# Altium PCB TTFT_3.0.PcbDoc
Units mil, origin at the board's own origin, x right, y up, seen from the top; angles counter-clockwise.
Board outline 2320 x 1680 mil, 4 copper layers (Top Layer, Internal Plane 1, Internal Plane 2, Bottom Layer), stack 30.634 mil thick; 23 components, 23 nets, 149 pads, 43 vias.
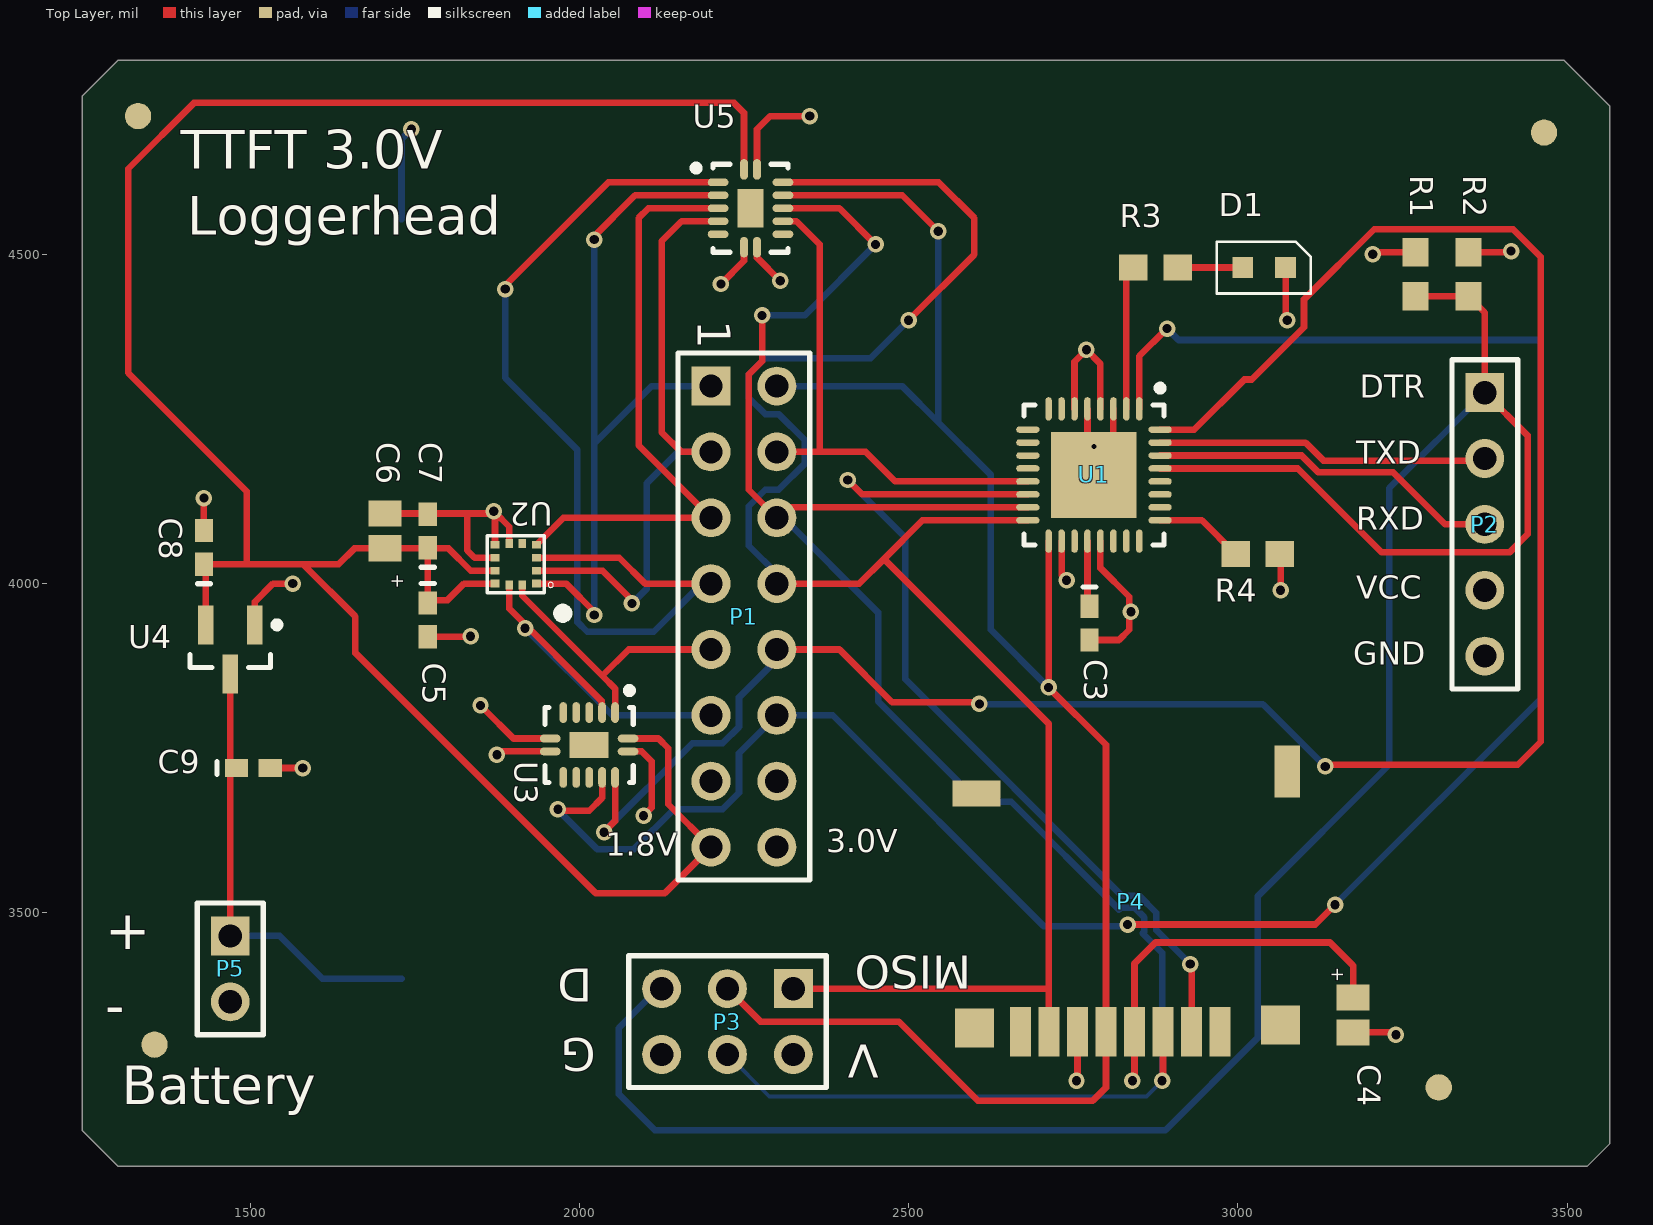
[diagram p0: Top Layer view]
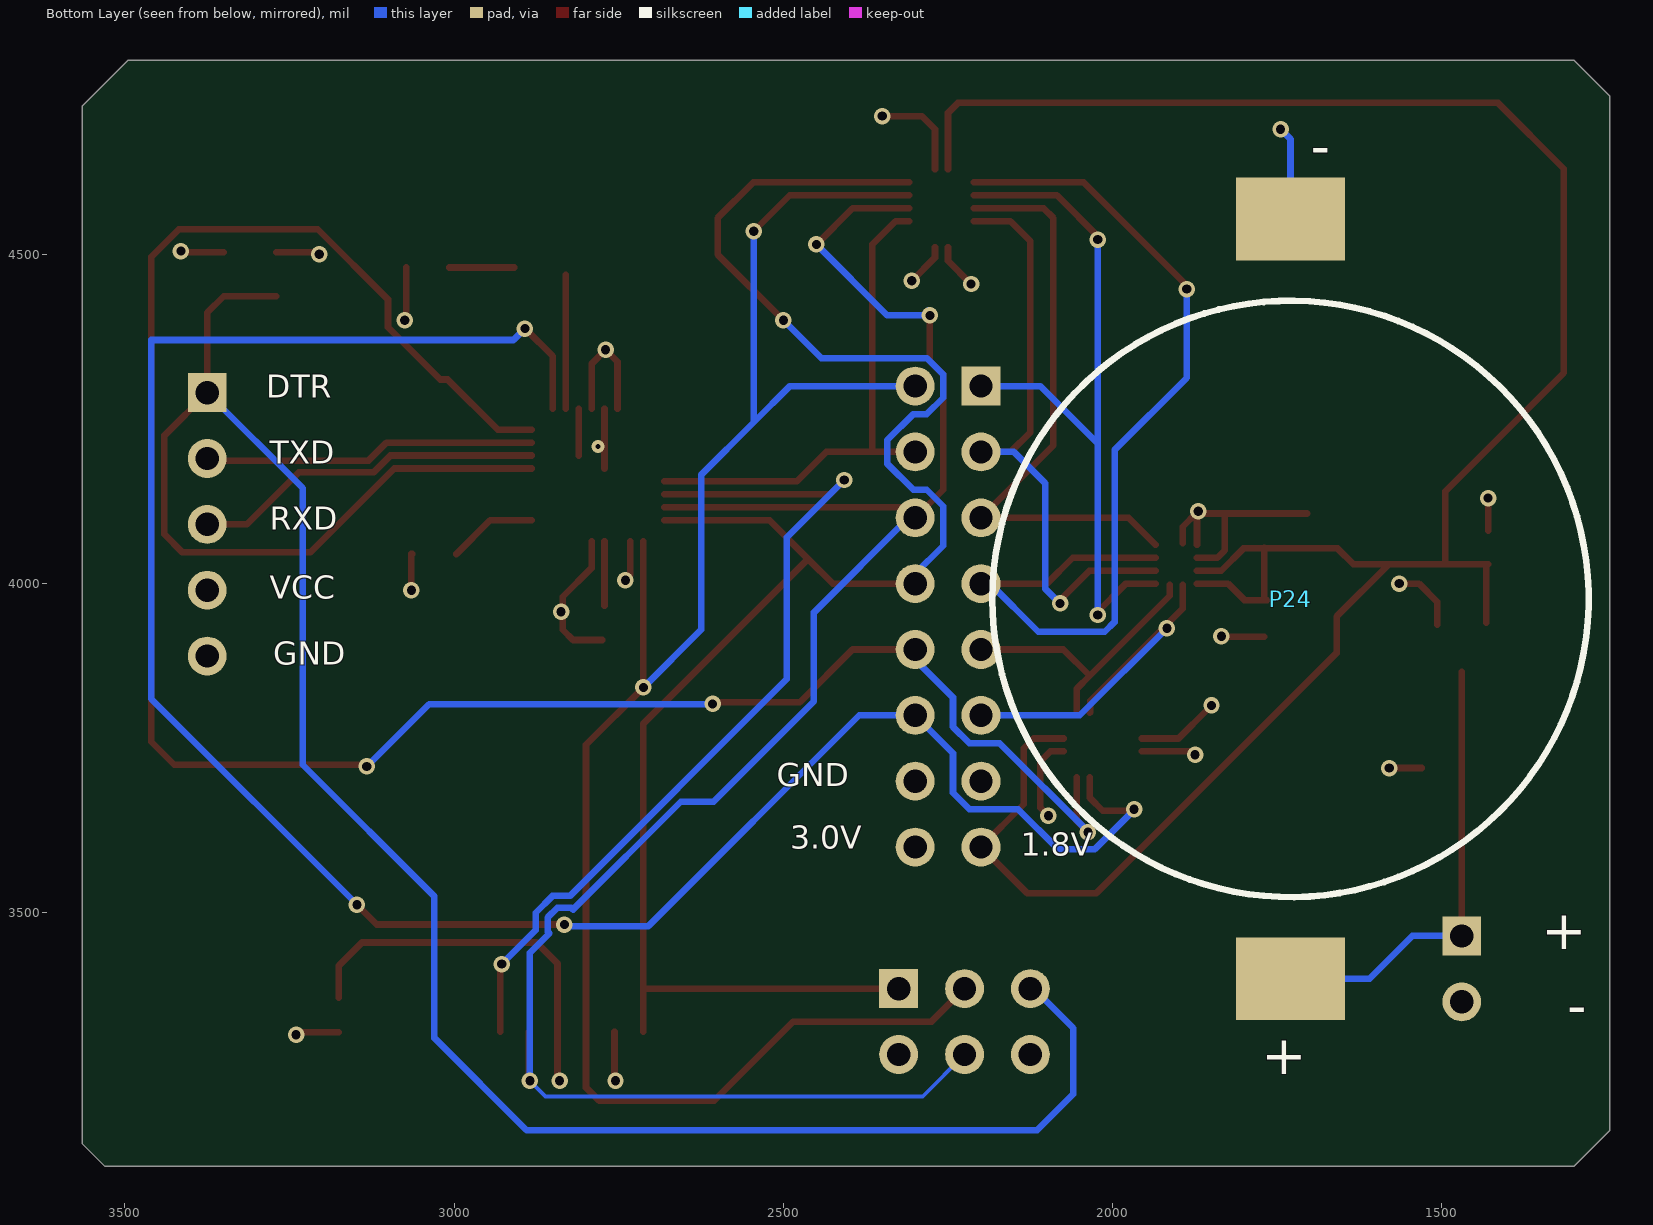
[diagram p1: Bottom Layer view, seen from below]
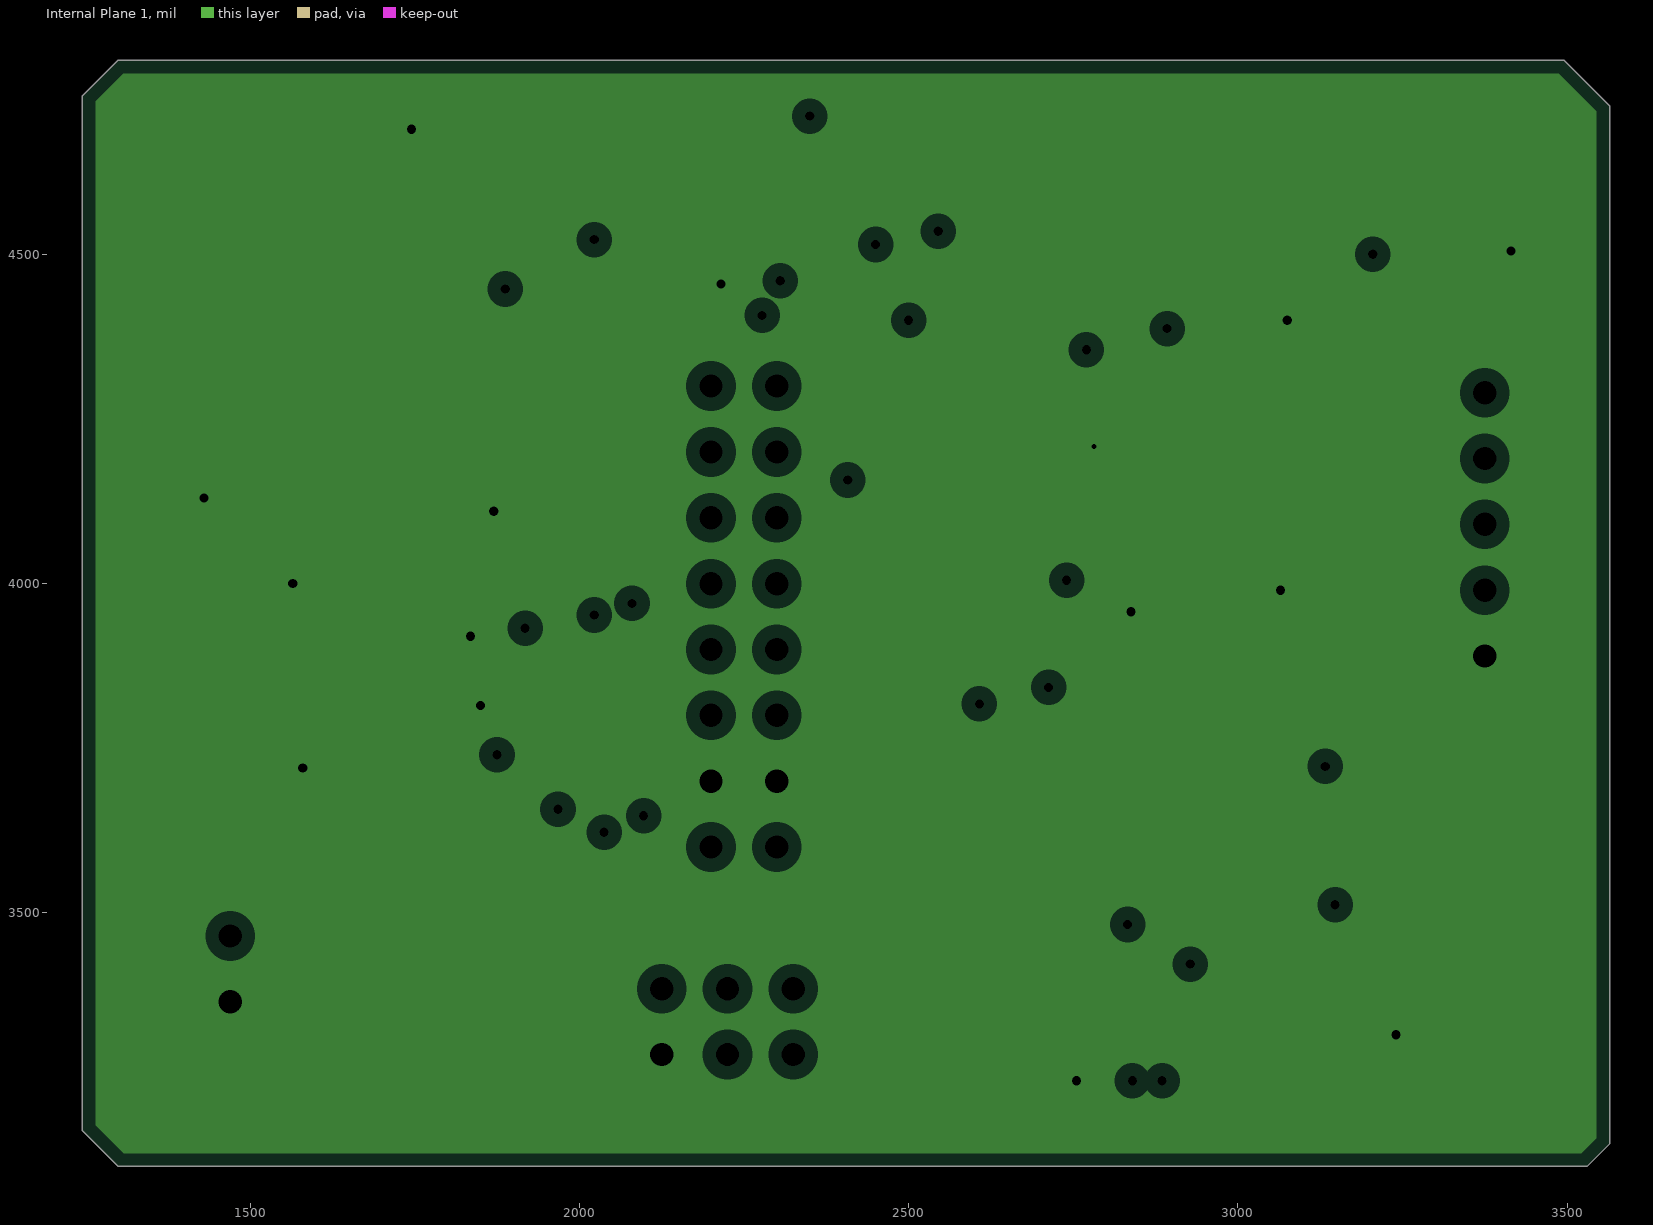
[diagram p2: Internal Plane 1, clearances drawn from the general rule]
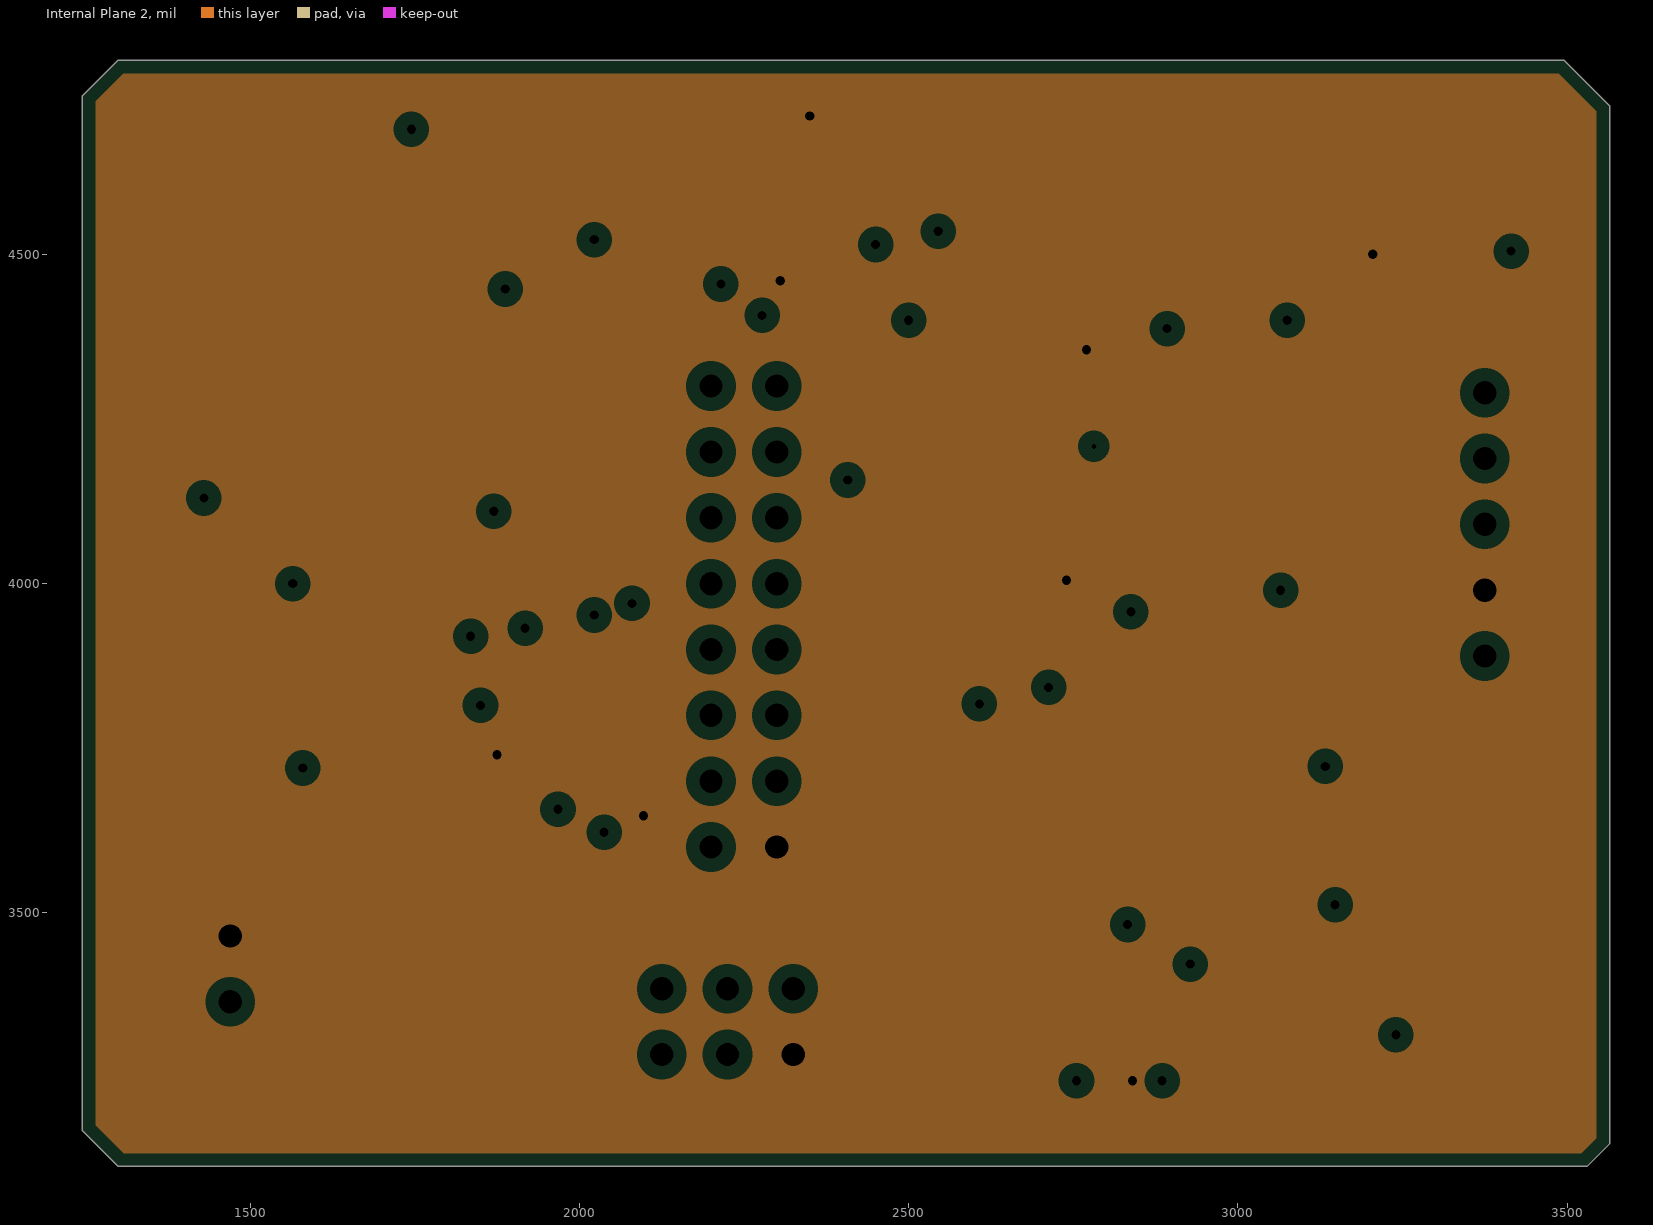
[diagram p3: Internal Plane 2, clearances drawn from the general rule]

## Layer stack, top to bottom
Top Solder: solder mask 0.4, Solder Resist, Dk 3.5
Top Layer: signal copper 1.4
Dielectric 1: core 10, FR-4, Dk 4.2
Internal Plane 1: plane copper 1.417, net GND
Dielectric 3: prepreg 5, Dk 4.2
Internal Plane 2: plane copper 1.417, net VCC
Dielectric 2: core 10, Dk 4.2
Bottom Layer: signal copper 1.4
Bottom Solder: solder mask 0.4, Solder Resist, Dk 3.5

## Board outline
1245,3170 1245,4740 1300,4795 3495,4795 3565,4725 3565,3150 3530,3115 1300,3115

## Design rules (kind name [scope] priority, off if disabled: settings)
Clearance [All] p1: gap=8
PlaneClearance [All] p1: clearance=20
PlaneConnect [All] p1: planeconnectstyle=Relief reliefexpansion=20 reliefentries=4 reliefconductorwidth=10 reliefairgap=10
PolygonConnect [All] p1: connectstyle=Relief reliefconductorwidth=10 reliefentries=4 polygonreliefangle="90 Angle" airgapwidth=10
RoutingVias [All] p1: holewidth=28 width=50 viastyle="Through Hole" minholewidth=28 minwidth=50 maxholewidth=28 maxwidth=50
SolderMaskExpansion [All] p1: expansion=4
Width [All] p1: maxlimit=100 minlimit=6 preferedwidth=10
27 further rules are at their usual default settings.

## Components (designator, comment, footprint, x,y, rotation, side; value= is the part's Value field where it differs from the comment)
C3 "0.1uF" 0402 2775,3940 r270 top
C4 "10uF" Tant0805 3175,3345 r90 top
C5 "100nF" 0402 1770,3945 r270 top
C6 "10uF" Tant0805 1705,4080 r270 top
C7 "100nF" 0402 1770,4080 r90 top
C8 "1.0uF" 0402 1430,4055 r90 top
C9 "1.0uF" 0402 1505,3720 r0 top
D1 "LED_0603" Diode0603 3040,4480 r0 top
P1 "Header 8X2A" HDR2X8_CEN 2200,4300 r270 top
P2 "Header 5" HDR1X5 3375,4290 r270 top
P3 "AVR SPI" HDR2X3 2325,3385 r180 top
P4 "microSD Hirose" "DM3D microSD" 2910,3445 r90 top
P5 "Header 2" HDR1X2 1470,3465 r270 top
P24 "CoinCellHolder" CoinCellHolder 1730,3400 r90 bottom
R1 "10k" 3-0603 3270,4470 r90 top
R2 "omit" 3-0603 3350,4470 r90 top
R3 "330" 3-0603 2875,4480 r0 top
R4 "omit" 3-0603 3030,4045 r0 top
U1 "ATmega8-16AC" 32M1-A_M 2781.54,4165 r270 top
U2 "LIS2DS12" LGA-12 1935,4000 r180 top
U3 "Level Shifter" DHVQFN14 2015,3755 r270 top
U4 "MCP1700T-1802E/TT" SOT-23-TT3_N 1470,3900 r270 top
U5 "Level Shifter" DHVQFN14 2260,4570 r0 top

## Footprints (in the part's own frame and the unit in brackets; to place one, negate y for a bottom-side part, rotate by r counter-clockwise, add the part's x,y. Pads: shape width x height; smd on the part's side, far side on the other; paste and mask are expansions set on the pad)
3-0603 [mm] "Chip Resistor; Body 1.6 x 0.9 mm (LxW typ)"
  rect 1.1x1 smd: 1(-0.85,0) 2(0.85,0)
32M1-A_M [mm] "QFN, 32-Leads, Body 5x5mm, Pitch 0.5mm, Thermal Pad 3.3x3.3mm, IPC Low Density"
  oval 0.9x0.25 smd: 1(-2.55,1.75) 2(-2.55,1.25) 3(-2.55,0.75) 4(-2.55,0.25) 5(-2.55,-0.25) 6(-2.55,-0.75) 7(-2.55,-1.25) 8(-2.55,-1.75) 17(2.55,-1.75) 18(2.55,-1.25) 19(2.55,-0.75) 20(2.55,-0.25) 21(2.55,0.25) 22(2.55,0.75) 23(2.55,1.25) 24(2.55,1.75)
  oval 0.25x0.9 smd: 9(-1.75,-2.55) 10(-1.25,-2.55) 11(-0.75,-2.55) 12(-0.25,-2.55) 13(0.25,-2.55) 14(0.75,-2.55) 15(1.25,-2.55) 16(1.75,-2.55) 25(1.75,2.55) 26(1.25,2.55) 27(0.75,2.55) 28(0.25,2.55) 29(-0.25,2.55) 30(-0.75,2.55) 31(-1.25,2.55) 32(-1.75,2.55)
  rect 3.3x3.3 smd paste-1.27: 33(0,0)
  silkscreen extent -3.47,-2.7 2.7,2.7, body extent -2.55,-2.55 2.55,2.55, height 1
0402 [mm] "Chip Capacitor; Body 1.0 x 0.5 mm (LxW typ)"
  rect 0.9x0.7 smd: 1(-0.65,0) 2(0.65,0)
  silkscreen extent -1.4,-0.25 -1.4,0.25
CoinCellHolder [mm] "MPD BU2032SM-BT-GTR"
  rect 3.2x4.2 smd: 1(0,0) 2(29.3,0)
  silkscreen extent 3.15,-11.5 26.15,11.5
DHVQFN14 [mm] "QFN, 14-Leads, Body 2.50x3.00mm, Pitch 0.50mm, Thermal Pad 1.00x1.50mm, IPC Medium Density"
  oval 0.3x0.8 smd: 1(-0.25,1.5) 7(-0.25,-1.5) 8(0.25,-1.5) 14(0.25,1.5)
  oval 0.8x0.3 smd: 2(-1.25,1) 3(-1.25,0.5) 4(-1.25,0) 5(-1.25,-0.5) 6(-1.25,-1) 9(1.25,-1) 10(1.25,-0.5) 11(1.25,0) 12(1.25,0.5) 13(1.25,1)
  rect 1x1.5 smd: 15(0,0)
  silkscreen extent -2.22,-1.7 1.45,1.7, body extent -1.3,-1.55 1.3,1.55, height 1
Diode0603 [mm]
  rect 0.8x0.8 smd: A(-0.825,0) K(0.825,0)
  silkscreen extent -1.83,-1 1.8,1
"DM3D microSD" [mm] "MICROSD_HIROSE Push-Pull"
  rect 1.5x1.5 smd: 0(-3.048,7.874) 0(-2.921,-3.937)
  rect 1x1.85 smd: 0(6,7.8)
  rect 2x1 smd: 0(6.85,-4.191)
  rect 1.9x0.8 smd: 1(-3.188,-1.601) 2(-3.188,-0.501) 3(-3.188,0.599) 4(-3.188,1.699) 5(-3.188,2.799) 6(-3.188,3.899) 7(-3.188,4.999) 8(-3.188,6.099)
  body extent -3.65,-4.45 7.8,7.5, height 1.55
HDR1X2 [mm] "Connector; Header; 2 Position"
  rect 1.5x1.5 hole 0.9: 1(0,0)
  round 1.5 hole 0.9: 2(2.54,0)
  silkscreen extent -1.27,-1.27 3.81,1.27
HDR1X5 [mm] "Connector; Header; 5 Position"
  rect 1.5x1.5 hole 0.9: 1(0,0)
  round 1.5 hole 0.9: 2(2.54,0) 3(5.08,0) 4(7.62,0) 5(10.16,0)
  silkscreen extent -1.27,-1.27 11.43,1.27
HDR2X3 [mm] "Connector; Header; 3x2 Position"
  rect 1.5x1.5 hole 0.9: 1(0,0)
  round 1.5 hole 0.9: 2(0,2.54) 3(2.54,0) 4(2.54,2.54) 5(5.08,0) 6(5.08,2.54)
  silkscreen extent -1.27,-1.27 6.35,3.81
HDR2X8_CEN [mm] "Connector; Header; 8x2 Position"
  rect 1.5x1.5 hole 0.9: 1(0,0)
  round 1.5 hole 0.9: 2(2.54,0) 3(5.08,0) 4(7.62,0) 5(10.16,0) 6(12.7,0) 7(15.24,0) 8(17.78,0) 9(0,2.54) 10(2.54,2.54) 11(5.08,2.54) 12(7.62,2.54) 13(10.16,2.54) 14(12.7,2.54) 15(15.24,2.54) 16(17.78,2.54)
  silkscreen extent -1.27,-1.27 19.05,3.81
LGA-12 [mm] "LIS2DS12"
  rect 0.35x0.3 smd: 1(0,0) 2(0,-0.5) 3(0,-1) 4(0,-1.5) 7(1.6,-1.5) 8(1.6,-1) 9(1.6,-0.5) 10(1.6,0)
  rect 0.3x0.35 smd: 5(0.55,-1.55) 6(1.05,-1.55) 11(1.05,0.05) 12(0.55,0.05)
  silkscreen extent -0.65,-1.85 1.9,0.35
SOT-23-TT3_N [mm] "SOT23, 3-Leads, Body 2.9x1.3mm, Pitch 0.95mm, Lead Span 2.4mm, IPC Medium Density"
  rect 1.5x0.6 smd: 1(-0.95,0.95) 2(-0.95,-0.95) 3(0.95,0)
  silkscreen extent -1.07,-1.55 0.7,1.93, body extent -0.7,-1.52 0.7,1.53, height 1.12
Tant0805 [mil]
  rect 40x50 smd: 1(-26.5,0) 2(26.5,0)

## Part data
C3 C5 C7 C8 C9: library part C0402, "Ceramic Chip Capacitor - Standard"
C4 C6: library part Tant0805
P1: "Header, 8-Pin, Dual row"
P2: "Header, 5-Pin"
P3: library part "Header 3X2", "Header, 3-Pin, Dual row"
P5: "Header, 2-Pin"
R1 R2 R3 R4: library part ERJ3RK, "Precision Thick Film Chip Resistor, 10 Ohm to 1M Ohm Range, 1% and 0.5% Tolerance, 0603 Size, 0.063 W"
U1: "8-Bit AVR Microcontroller with 8K Bytes of In-System Programmable Flash Memory"
U3 U5: library part NTB0104, "Voltage level translator"
U4: "Low Quiescent Current LDO, 3-Pin SOT-23, Extended Temperature, Tape and Reel"

## Free pads (board coordinates)
  round 40 smd paste-20 mask+5: 0(1330,4710) 0(1355,3300) 0(3305,3235) 0(3465,4685)

## Via types
v1: diameter 25, hole 14, Top Layer to Bottom Layer, 42 vias
v2: diameter 19.68, hole 7.87, Top Layer to Bottom Layer, 1 vias

## Nets (pads, with @x,y where several pads share a name; then routed paths per layer and width w, separated by ;. In a path a pad name is that pad's centre, name@x,y a point inside that pad or via, vN(x,y) a via of type N, cw(c..) or ccw(c..) an arc to the next point about the centre after c; other vN are vias at no path point)
CS: P4.2 U1.14 | length 1349.3
  Top Layer w10: v1@2410,4155 2429.53,4135.47 U1.14 ; P4.2 v1@2929.72,3420.28
  Bottom Layer w10: v1(2407.64,4157.36) 2495,4070 2495,3855 2824.14,3525.86 2850.66,3525.86 2876.14,3500.38 2876.14,3473.86 v1@2930,3420
  other v1: 2927.64,3422.36
CS_LIS: P1.10 U1.13 U5.10 | length 785.1
  Top Layer w10: P1.10 2435,4200 2479.84,4155.16 U1.13 ; U5.10 2329.69,4550.31 2365,4515 2365,4200
CS_LIS_1.8: P1.2 U2.2 U5.5 | length 951.8
  Top Layer w10: U2.2 2035.31,4019.69 v1@2082.5,3972.5 ; P1.2 2155,4200 2125,4230 2125,4520 2155.31,4550.31 U5.5
  Bottom Layer w10: v1(2080,3970) 2102.64,3992.64 2102.64,4152.64 2150,4200 P1.2
DTR: P2.1 P3.5 R1.1 R2.1 U1.29 | length 3464.6
  Top Layer w10: U1.29 3091.06,4174.84 3218.43,4047.47 3412.47,4047.47 3440,4075 3440,4225 P2.1 3375,4411.54 R2.1 R1.1
  Bottom Layer w10: P3.5 2120,3385 2060,3325 2060,3225 2115,3170 2890,3170 3030,3310 3030,3525 3230,3725 3230,4145 P2.1
GND: C3.2 C4.1 C5.2 C6.1 C7.2 C8.2 C9.2 D1.K P1.7 P1.15 P2.5 P3.6 P4.6 P5.2 P24.2 R2.2 R4.2 U1.3 U1.5 U1.21 U1.33 U2.6 U2.7 U2.8 U3.7 U4.1 U5.7 | length 1686.1
  Top Layer w10: C8.2 v1(1430,4130) ; U4.1 1507.4,3972.4 1535,4000 v1(1565,4000) ; C9.2 v1(1580,3720) ; C6.1 1830,4106.5 ; C5.2 v1@1834.41,3919.41 ; v1@1855,3810 1900.16,3764.84 U3.7 ; v1@1870.52,4106.5 1830,4106.5 ; U2.8 1841.09,4039.37 1830,4050.46 1830,4106.5 ; U2.7 1872.01,4107.99 1893.66,4086.34 U2.6 ; v1(2215,4455) 2250.16,4490.16 U5.7 ; v1@2756.5,3246.5 P4.6 ; U1.33@2771.69,4174.84 U1.5 ; C3.2 2819.41,3914.41 2835,3930 2835,3980 2791.38,4023.62 U1.21 ; U1.33@2811.06,4194.53 U1.3 ; R4.2 R4.2@3065,4045 ; v1(3065,3990) R4.2@3065,4043.46 ; v1@3072.48,4402.52 D1.K ; C4.1 v1@3238.5,3318.5 ; R2.2 v1@3413.46,4503.46
  Bottom Layer w10: P24.2 1730,4675 v1(1745,4690)
  other v1: 2755,3245 3240,3315 1850,3815 1835,3920 2837.64,3957.36 1870,4110 3075,4400 3415,4505
  other v2: 2781.54,4208.31
INT1: P1.13 U1.32 U3.13 | length 3224.2
  Top Layer w10: v1@2040,3625 2054.37,3639.37 U3.13 ; P1.13 2395,3900 2475,3820 v1@2605,3820 ; U1.32 2933.9,4233.9 3010,4310 3021.06,4310 3100.5,4389.44 3100.5,4431.56 3207.06,4538.12 3417.94,4538.12 3460,4496.06 3460,3760 3425,3725 v1@3135,3725
  Bottom Layer w10: v1(2037.64,3622.36) 2037.64,3623.42 2171.69,3757.47 2217.62,3757.47 2242.53,3782.38 2242.53,3827.25 2300,3884.72 P1.13 ; v1(2607.64,3817.36) 2608.14,3816.86 3038.14,3816.86 v1(3132.64,3722.36)
INT1_1.8: P1.5 U2.12 U3.2 | length 433.8
  Top Layer w10: U2.12 1913.35,3981.65 2035,3860 ; U3.2 2054.37,3840.63 2035,3860 ; P1.5 2075,3900 2035,3860
INT2: P1.14 U1.1 U3.12 | length 3282.4
  Top Layer w10: v1@1965,3655 2015,3655 2034.68,3674.68 U3.12 ; v1(2832.64,3482.36) 3117.64,3482.36 v1(3147.64,3512.36) ; U1.1 2850.43,4345.43 v1@2890,4385
  Bottom Layer w10: v1(1967.64,3657.36) 1967.64,3656.3 2027.08,3596.86 2083.2,3596.86 2143.81,3657.47 2217.62,3657.47 2242.53,3682.38 2242.53,3742.53 P1.14 2385,3800 2705,3480 v1@2835,3480 ; v1(2892.64,4387.36) 2910,4370 3460,4370 3460,3825 v1@3145,3510
INT2_1.8: P1.6 U2.11 U3.3 | length 589.4
  Top Layer w10: U2.11 1893.66,3962.13 2033.91,3821.89 2033.91,3804.99 U3.3
  Bottom Layer w10: v1(1917.64,3932.36) 2050,3800 P1.6
LED1: R3.1 U1.2 | length 203.8
  Top Layer w10: U1.2 R3.1@2830.75,4469.21
MISO: P1.12 P3.1 P4.7 U1.16 U5.13 | length 2846.8
  Top Layer w10: P1.12 2425,4000 2462.5,4037.5 ; U5.13 2545.63,4609.37 2600,4555 2600,4500 v1(2500,4400) ; P3.1 2713.19,3385 ; U1.16 2521.1,4096.1 2462.5,4037.5 ; P4.7 2713.19,3385 ; 2462.5,4037.5 2713.19,3786.81 2713.19,3385
  Bottom Layer w10: P1.12 2300,4014.94 2257.47,4057.47 2257.47,4117.62 2282.38,4142.53 2302.67,4142.53 2342.53,4182.38 2342.53,4217.62 2302.67,4257.47 2282.38,4257.47 2257.47,4282.38 2257.47,4317.62 2282.38,4342.53 2442.53,4342.53 v1(2500,4400)
MISO_1.8: P1.4 U2.3 U5.2 | length 1463.4
  Top Layer w10: v1@1885,4450 2044.37,4609.37 U5.2 ; U2.3 2060.63,4039.37 2100,4000 P1.4
  Bottom Layer w10: v1(1887.64,4447.36) 1887.64,4312.36 1997.14,4202.86 1997.14,3941.8 2012.08,3926.86 2113.2,3926.86 2186.34,4000 P1.4
MOSI: P1.11 P3.4 P4.3 U1.15 U5.11 | length 3001.3
  Top Layer w10: v1(2277.64,4407.36) 2277.64,4337.78 2257.47,4317.62 2257.47,4142.53 P1.11 ; U5.11 2395,4570 v1(2450,4515) ; P1.11@2315.79,4115.79 U1.15 ; v1@2886.42,3246.42 P4.3
  Bottom Layer w6: P3.4 2288.5,3221.5 2861.5,3221.5 v1(2885,3245)
  Bottom Layer w10: v1@2280,4415 2287.64,4407.36 2342.36,4407.36 v1(2450,4515) ; P1.11 2310,4100 2453.75,3956.25 2453.75,3821.25 2606.25,3668.75 2655.79,3668.75 2819.38,3505.17 2822.08,3507.86 2843.2,3507.86 2858.14,3492.92 2858.14,3471.8 2855.44,3469.1 2885,3439.54 v1(2885,3245)
MOSI_1.8: P1.3 U2.4 U5.4 | length 909.5
  Top Layer w10: U2.4 1975.94,4100 P1.3 2090,4210 2090,4555 2105,4570 U5.4
NetC3_1: C3.1 U1.20 | length 97.9
  Top Layer w10: C3.1@2771.69,3966.69 U1.20
NetD1_A: D1.A R3.2 | length 99.1
  Top Layer w10: R3.2 D1.A
RXD: P2.3 U1.30 | length 536.4
  Top Layer w10: U1.30 3096.83,4194.53 3122.47,4168.88 3236.12,4168.88 3315,4090 P2.3
SCK: P1.9 P3.3 P4.5 U1.17 U5.12 | length 2807.6
  Top Layer w10: P3.3 2275,3335 2485,3335 2605,3215 2780,3215 2799.8,3234.8 P4.5 2799.8,3755.2 v1(2712.64,3842.36) U1.17 ; U5.12 2490.32,4589.69 v1(2545,4535)
  Bottom Layer w10: P1.9 2490,4300 2545,4245 ; v1(2545,4535) 2545,4245 ; v1(2712.64,3842.36) 2625,3930 2625,4165 2545,4245
SCK_1.8: P1.1 U2.1 U5.3 | length 1109.8
  Top Layer w10: U2.1 1980,4000 v1@2025,3955 ; v1@2020,4525 2084.68,4589.69 U5.3
  Bottom Layer w10: v1(2022.64,3952.36) 2022.64,4212.64 ; v1(2022.64,4522.36) 2022.64,4212.64 ; P1.1 2110,4300 2022.64,4212.64
STOP: R4.1 U1.25 | length 135.8
  Top Layer w10: U1.25 2945.43,4096.1 R4.1
TXD: P2.2 U1.31 | length 505.7
  Top Layer w10: U1.31 3102.6,4214.21 3129.93,4186.88 3371.88,4186.88 P2.2
V1.8: C5.1 C6.2 C7.1 C8.1 P1.8 U2.9 U2.10 U3.1 U4.2 U5.1 | length 3619.1
  Top Layer w10: C8.1 1495,4029.41 ; U4.2@1432.6,3940.87 C8.1@1432.6,4026.81 ; C5.1@1765.59,3975 1800,3975 1825,4000 U2.10 ; C5.1@1770,3979.41 C7.1@1770,4053.5 ; C7.1 C7.1@1770,4053.5 ; U2.9 1835.31,4019.69 1801.5,4053.5 C7.1@1770,4053.5 ; U3.1 2120.16,3764.84 2135,3750 2135,3665 P1.8 2130,3530 2024.76,3530 1660.11,3894.65 1660.11,3949.89 1580.59,4029.41 ; U5.1 2250.16,4714.84 2235,4730 1415,4730 1315,4630 1315,4320 1495,4140 1495,4029.41 ; 1495,4029.41 1580.59,4029.41 ; 1580.59,4029.41 1634.41,4029.41 1658.5,4053.5 C6.2 C7.1@1770,4053.5
VCC: C4.2 C9.1 P1.16 P2.4 P3.2 P4.4 P5.1 P24.1 R1.2 U1.4 U1.6 U1.18 U3.8 U3.14 U4.3 U5.8 U5.14 | length 2020
  Top Layer w10: P5.1 U4.3 U4.3@1470,3866.06 ; v1@1875.16,3745.16 U3.8 ; U3.14 2094.84,3745.16 2110,3730 2110,3660 v1@2095,3645 ; U5.8 2269.84,4495.16 v1(2305,4460) ; U5.14 2269.84,4689.84 2290,4710 v1(2350,4710) ; U1.18 2732.32,4012.68 v1(2740,4005) ; U1.6 2752.01,4337.01 v1(2770,4355) 2791.38,4333.62 U1.4 ; v1@2843.11,3248.11 P4.4 2843.11,3423.11 2875,3455 3140,3455 3175,3420 C4.2 ; v1@3208.46,4503.46 R1.2
  Bottom Layer w10: P5.1 1545,3465 1610,3400 P24.1
  other v1: 2840,3245 2097.64,3647.36 1875,3740 3205,4500
pads on no net: P4.0 P4.1 P4.8 U1.7 U1.8 U1.9 U1.10 U1.11 U1.12 U1.19 U1.22 U1.23 U1.24 U1.26 U1.27 U1.28 U2.5 U3.4 U3.5 U3.6 U3.9 U3.10 U3.11 U3.15 U5.6 U5.9 U5.15

## Polygon pours and split planes (outlines as drawn)
GND on Internal Plane 1 (split plane): 3544.9,4716.68 3544.9,3158.32 3521.68,3135.1 1308.32,3135.1 1265.1,3178.32 1265.1,4731.68 1308.32,4774.9 3486.68,4774.9
VCC on Internal Plane 2 (split plane): 3544.9,4716.68 3544.9,3158.32 3521.68,3135.1 1308.32,3135.1 1265.1,3178.32 1265.1,4731.68 1308.32,4774.9 3486.68,4774.9

## Silkscreen, mask and mechanical layers (free items; w line width, h text height)
Top Overlay:
  circle w15: c1975,3955 r7.07
  text "TTFT 3.0V" at 1395,4610 h100
  text "Loggerhead" at 1405,4510 h100
  text "DTR" at 3185,4270 h60
  text "TXD" at 3180,4170 h60
  text "RXD" at 3180,4070 h60
  text "VCC" at 3180,3965 h60
  text "GND" at 3175,3865 h60
  text "3.0V" at 2375,3580 h60
  text "1.8V" at 2040,3575 h60
  text "+" at 1280,3445 h60
  text "-" at 1280,3330 h60
  text "Battery" at 1305,3190 h100
Bottom Overlay:
  text "-" at 1670,4635 h60
  text "DTR" at 3285,4270 h60
  text "TXD" at 3280,4170 h60
  text "RXD" at 3280,4070 h60
  text "VCC" at 3280,3965 h60
  text "GND" at 3275,3865 h60
  text "GND" at 2510,3680 h60
  text "3.0V" at 2490,3585 h60
  text "1.8V" at 2140,3575 h60
  text "+" at 1280,3445 h60
  text "-" at 1280,3330 h60
  text "+" at 1705,3255 h60
Mechanical 1:
  the board outline again, w10

## Text inside footprints (layer, text, board x,y; h text height)
C4: Top Overlay "+" at 3160,3395 h19.68 r90
C6: Top Overlay "+" at 1715,4015 h19.68 r270
P1: Top Overlay "1" at 2180,4400 h50 r270
P3: Top Overlay "MISO" at 2595,3435 h50 r180; Top Overlay "V" at 2455,3300 h50 r180; Top Overlay "D" at 2020,3415 h50 r180; Top Overlay "G" at 2025,3310 h50 r180